# EAGLE board Shield_LevelShifter1_DIP (EAGLE 9.4.2)
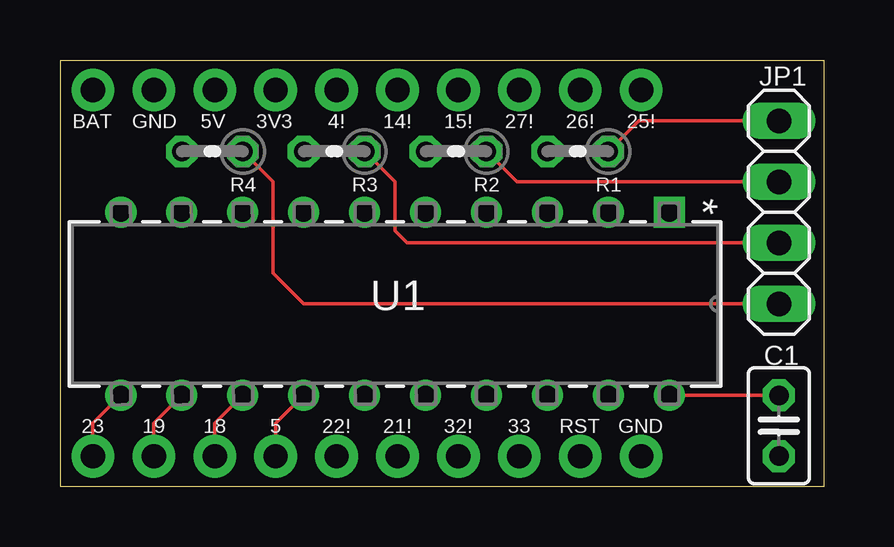
[diagram p0: board, top side]
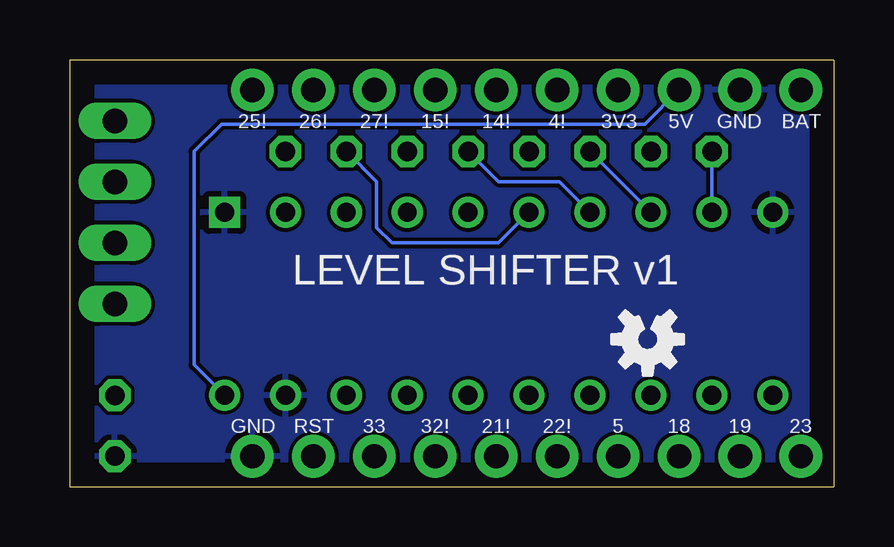
[diagram p1: board, bottom side, seen from below]

Size 31.85 x 17.78 mm. Coordinates in mm from the lower left corner, seen from the top.
Outline: 31.85,0 0,0 0,17.78 31.85,17.78 31.85,0
Copper layers (1*16): Top 0.035mm / dielectric 1.5mm / Bottom 0.035mm
Design rules "default": minimum track width 6mil, minimum drill 0.35mm, track to track 6mil, track to pad 6mil, pad to pad 6mil, via to via 6mil, smd to smd 6mil, copper to edge 40mil, drill to drill 6mil, minimum pad ring 10mil, minimum via ring 8mil, stop-mask expansion 4mil, vias tented up to drill 0mil, thermal gap 10mil

## Footprints (pad centres in the part's own frame; a part is rotated, then mirrored left to right if it is on the bottom)
C025-025X050 = drill 0.813 octagon: 1 -1.27,0; 2 1.27,0
1X04 = drill 1.016 long: 1 -3.81,0; 2 -1.27,0; 3 1.27,0; 4 3.81,0
1X10_NO_SILK = drill 1.016 pad 1.778: 1 0,0; 2 2.54,0; 3 5.08,0; 4 7.62,0; 5 10.16,0; 6 12.7,0; 7 15.24,0; 8 17.78,0; 9 20.32,0; 10 22.86,0
0204V = drill 0.813 octagon: 1 -1.27,0; 2 1.27,0
N20 = drill 0.787 pad 1.295 square: 1 -7.62,22.86 | drill 0.787 pad 1.295: 2 -7.62,20.32; 3 -7.62,17.78; 4 -7.62,15.24; 5 -7.62,12.7; 6 -7.62,10.16; 7 -7.62,7.62; 8 -7.62,5.08; 9 -7.62,2.54; 10 -7.62,0; 11 0,0; 12 0,2.54; 13 0,5.08; 14 0,7.62; 15 0,10.16; 16 0,12.7; 17 0,15.24; 18 0,17.78; 19 0,20.32; 20 0,22.86

## Placement (x,y rotation side)
C1  [C025-025X050]  29.97,2.54 270 top
JP1  [1X04]  29.97,11.43 270 top
LEFT  [1X10_NO_SILK]  1.37,16.54 0 top
LOGO1  OSHW-LOGOS  [OSHW-LOGO-S]  7.75,6.14 180 bottom
R1  300-500Ω  [0204V]  21.59,13.97 180 top
R2  300-500Ω  [0204V]  16.51,13.97 180 top
R3  300-500Ω  [0204V]  11.43,13.97 180 top
R4  300-500Ω  [0204V]  6.35,13.97 180 top
RIGHT  [1X10_NO_SILK]  1.37,1.27 0 top
U1  SN74HCT245N  [N20]  2.54,3.81 270 top

## Library data of the parts
C1 = rcl; SPICEPREFIX: C
JP1 = pinhead
LEFT RIGHT = UnexpectedMaker; PROD_ID: CONN-11563
LOGO1 = SparkFun-Aesthetics
R1-R4 = rcl; SPICEPREFIX: R
U1 = SN74HCT245; MANUFACTURER_PART_NUMBER: SN74HCT245N; VENDOR: Texas Instruments

## Nets
3.3V: LEFT.4
+5V: C1.1 LEFT.3 U1.20
GND: C1.2 LEFT.2 RIGHT.10 U1.1 U1.10 U1.19
GPIO4: LEFT.5
GPIO5: RIGHT.4 U1.14
GPIO14: LEFT.6
GPIO15: LEFT.7
GPIO18: RIGHT.3 U1.13
GPIO19: RIGHT.2 U1.12
GPIO21: RIGHT.6
GPIO22: RIGHT.5
GPIO23: RIGHT.1 U1.11
GPIO25: LEFT.10
GPIO26: LEFT.9
GPIO27: LEFT.8
GPIO32: RIGHT.7
GPIO33: RIGHT.8
N$2: R1.2 U1.6
N$3: R2.2 U1.7
N$4: R3.2 U1.8
N$5: R4.2 U1.9
N$10: JP1.1 R1.1
N$11: JP1.2 R2.1
N$12: JP1.3 R3.1
N$13: JP1.4 R4.1
RESET: RIGHT.9
VBAT: LEFT.1

## Tracks (layer width: path | path; a pad name or v marks a point on that pad's centre or on a via)
+5V
  Top 0.152: C1.1 U1.20
  Bottom 0.152: 6.67,16.51 LEFT.3 7.87,15.11 25.53,15.11 26.67,13.97 26.67,5.08 U1.20
GND
  pour Bottom: 32.38,18.41 32.38,-0.64 -1.27,-0.64 -1.27,18.41
GPIO5
  Top 0.152: RIGHT.4 8.99,2.64 U1.14
GPIO18
  Top 0.152: RIGHT.3 6.45,2.64 U1.13
GPIO19
  Top 0.152: RIGHT.2 3.91,2.64 U1.12
GPIO23
  Top 0.152: RIGHT.1 1.37,2.64 U1.11
N$2
  Bottom 0.152: U1.6 13.97,10.16 18.41,10.16 19.05,10.79 19.05,10.85 19.05,11.43 19.05,12.7 R1.2
N$3
  Bottom 0.152: U1.7 11.44,12.71 13.98,12.71 R2.2
N$4
  Bottom 0.152: U1.8 R3.2
N$5
  Bottom 0.152: U1.9 R4.2
N$10
  Top 0.152: R1.1 24.13,15.24 JP1.1
N$11
  Top 0.152: R2.1 19.05,12.7 JP1.2
N$12
  Top 0.152: JP1.3 14.48,10.16 13.97,10.67 13.97,12.7 R3.1
N$13
  Top 0.152: JP1.4 10.16,7.62 8.89,8.89 8.89,12.7 R4.1

## Text on the board
bPlace: LEVEL SHIFTER v1
tNames: BAT | GND | 5V | 3V3 | 4! | 14! | 15! | 27! | 26! | 25! | 23 | 19 | 18 | 5 | 22! | 21! | 32! | 33 | RST | GND
bNames: BAT | GND | 5V | 3V3 | 4! | 14! | 15! | 27! | 26! | 25! | 23 | 19 | 18 | 5 | 22! | 21! | 32! | 33 | RST | GND